# Altium PCB TDA-sma_rev2.PcbDoc
Units mm, origin at the board's own origin, x right, y up, seen from the top; angles counter-clockwise.
Board outline 14 x 38.5 mm, 4 copper layers (Top Layer, Signal Layer 1, Signal Layer 2, Bottom Layer), stack 0.651 mm thick; 4 components, 10 nets, 23 pads, 37 vias.
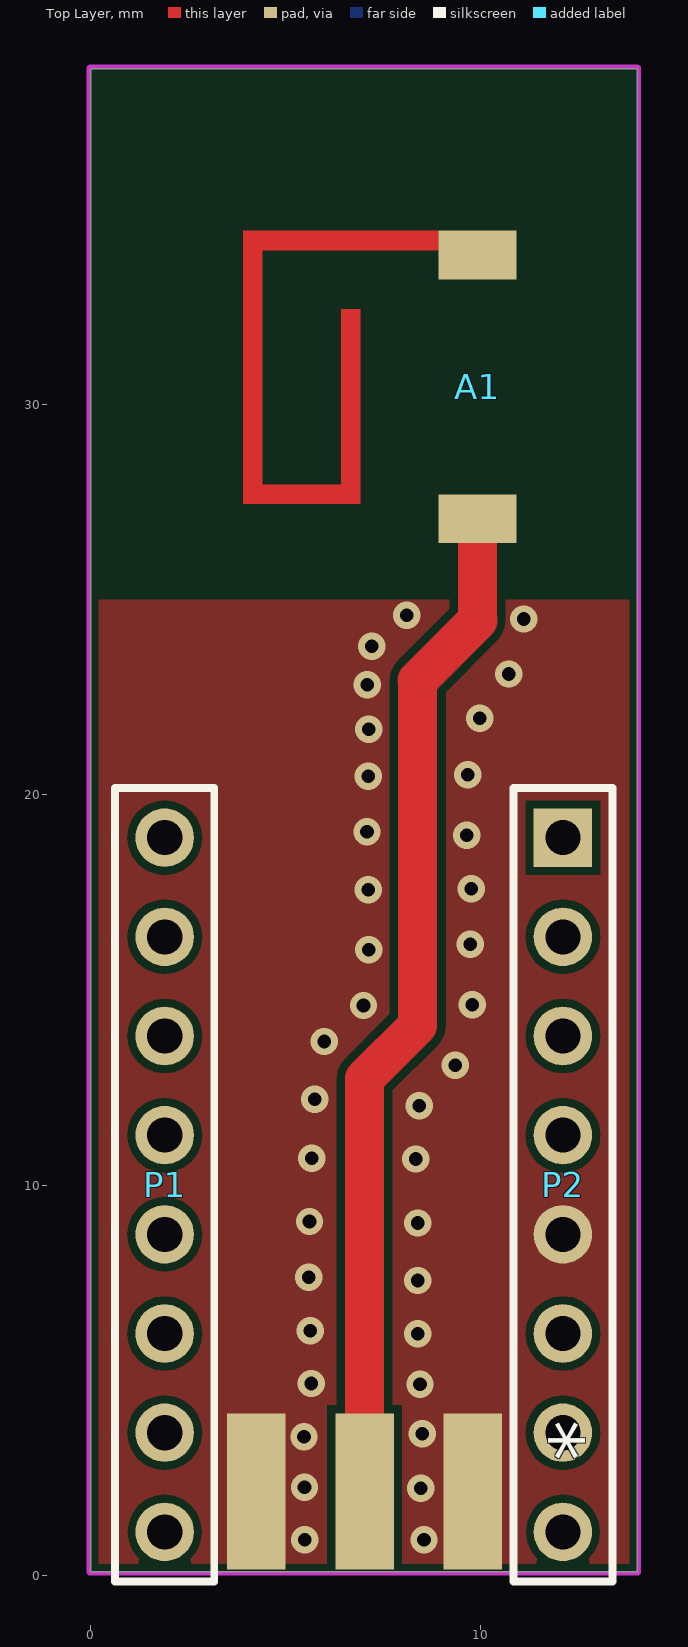
[diagram p0: Top Layer view]
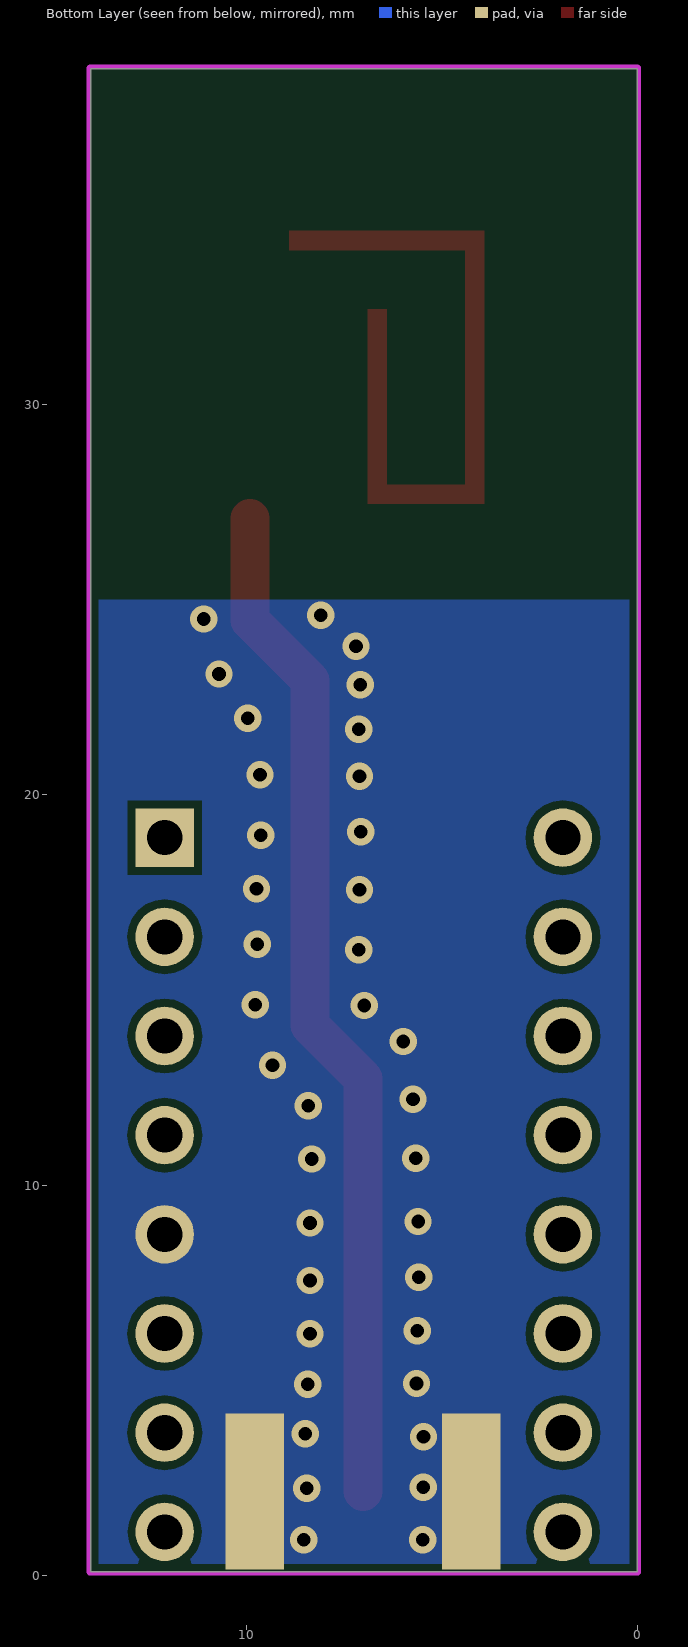
[diagram p1: Bottom Layer view, seen from below]

## Layer stack, top to bottom
Top Solder: solder mask 0.0102, Solder Resist, Dk 3.5
Top Layer: signal copper 0.0356
Dielectric1: prepreg 0.127, FR-4, Dk 4.2
Signal Layer 1: signal copper 0.036
Dielectric 3: core 0.254, FR-4, Dk 4.2
Signal Layer 2: signal copper 0.036
Dielectric 2: prepreg 0.127, FR-4, Dk 4.2
Bottom Layer: signal copper 0.0356
Bottom Solder: solder mask 0.0102, Solder Resist, Dk 3.5

## Board outline
0,0.1 14,0.1 14,38.6 0,38.6

## Design rules (kind name [scope] priority, off if disabled: settings)
Clearance Clearance_RF [InNet('RF')] p1: gap=0.22
Clearance [All] p2: gap=0.2
MinimumSolderMaskSliver [All] p1: minsoldermaskwidth=0.1
PlaneConnect [InNet('GND')] p1: planeconnectstyle=Relief reliefexpansion=0.508 reliefentries=4 reliefconductorwidth=0.254 reliefairgap=0.254
PolygonConnect PolygonConnect_1 [InComponent('X1')] p1: connectstyle=Relief reliefconductorwidth=0.254 reliefentries=4 polygonreliefangle="90 Angle" airgapwidth=0.254
PolygonConnect [All] p2: connectstyle=Direct reliefconductorwidth=0.254 reliefentries=4 polygonreliefangle="90 Angle" airgapwidth=0.254
RoutingVias [All] p1: holewidth=0.711 width=1.27 viastyle="Through Hole" minholewidth=0.3 minwidth=0.6 maxholewidth=0.711 maxwidth=1.27
SilkToSolderMaskClearance [IsPad] p1: minsilkscreentomaskgap=0 clearancetoexposedcopper=TRUE
SolderMaskExpansion [All] p1: expansion=0.07
Width Width_RF [InNet('RF')] p1: maxlimit=1.1 minlimit=0.254 preferedwidth=1
Width [All] p2: maxlimit=0.7 minlimit=0.254 preferedwidth=0.254 midlayer1_maxwidth=0.254 midlayer2_maxwidth=0.254 minimp=50.000000 maximp=50.000000 favimp=50.000000
27 further rules are at their usual default settings.

## Components (designator, comment, footprint, x,y, rotation, side; value= is the part's Value field where it differs from the comment)
* "SMA" SMA 7.02,0.15 r0 top
A1 "antenna" "Chip Antenna" 9.91,27.07 r0 top
P1 "Header 8" HDR1X8#1 1.9,18.9 r270 top
P2 "Header 8" HDR1X8#2 12.1,18.9 r270 top

## Footprints (in the part's own frame and the unit in brackets; to place one, negate y for a bottom-side part, rotate by r counter-clockwise, add the part's x,y. Pads: shape width x height; smd on the part's side, far side on the other; paste and mask are expansions set on the pad)
"Chip Antenna" [mm]
  rect 2x1.25 smd: 1(0,0) 2(0,6.75)
  Top Layer region: -3,5.375 -3.5,5.375 -3.5,0.375 -3,0.375
  Top Layer region: -3,0.875 -6,0.875 -6,0.375 -3,0.375
  Top Layer region: -5.5,7.375 -6,7.375 -6,0.375 -5.5,0.375
  Top Layer region: -1,7.375 -6,7.375 -6,6.875 -1,6.875
  body extent -1,0 1,7, height 0.8
HDR1X8#1 [mm] "Connector; Header; 8 Position"
  round 1.5 hole 0.9: 1(0,0) 2(2.54,0) 3(5.08,0) 4(7.62,0) 5(10.16,0) 6(12.7,0) 7(15.24,0) 8(17.78,0)
  silkscreen extent -1.27,-1.27 19.05,1.27
HDR1X8#2 [mm] "Connector; Header; 8 Position"
  rect 1.5x1.5 hole 0.9: 1(0,0)
  round 1.5 hole 0.9: 2(2.54,0) 3(5.08,0) 4(7.62,0) 5(10.16,0) 6(12.7,0) 7(15.24,0) 8(17.78,0)
  silkscreen extent -1.27,-1.27 19.05,1.27
SMA [mm]
  rect 1.5x4 smd: 0(-2.77,2) 0(2.77,2) 1(0,2)
  rect 1.5x4 smd far side: 0(-2.77,2) 0(2.77,2)

## Part data
P1 P2: "Header, 8-Pin"

## Via types
v1: diameter 0.7, hole 0.35, Top Layer to Bottom Layer, tented both sides, 37 vias

## Nets (pads, with @x,y where several pads share a name; then routed paths per layer and width w, separated by ;. In a path a pad name is that pad's centre, name@x,y a point inside that pad or via, vN(x,y) a via of type N, cw(c..) or ccw(c..) an arc to the next point about the centre after c; other vN are vias at no path point)
GND: *.0 P2.5
  other v1: 5.49,0.92 8.54,0.92 8.46,2.24 5.48,2.26 5.47,3.56 8.5,3.63 5.65,4.92 8.44,4.9 8.38,6.19 5.63,6.27 8.38,7.56 5.59,7.64 8.38,9.03 5.61,9.07 8.33,10.67 5.67,10.69 8.42,12.03 5.74,12.2 9.34,13.07 5.99,13.68 6.99,14.6 9.78,14.62 7.13,16.03 9.73,16.17 7.11,17.57 9.75,17.59 9.64,18.96 7.08,19.05 7.11,20.47 9.66,20.51 7.13,21.68 9.97,21.96 7.09,22.82 10.71,23.09 7.2,23.8 11.1,24.5 8.1,24.6
MISO/P0.15: P1.3
MOSI/P0.14: P1.4
P0.6: P1.8
P0.8: P1.6
P0.9: P1.5
P2.0: P1.2
PP2/P2.6: P1.1
RF: *.1 A1.1 | length 26.1
  Top Layer w1: *.1 7.02,12.73 8.38,14.09 8.38,22.93 9.91,24.46 A1.1
SCLK/P0.7: P1.7 | length 0.3
  Bottom Layer w0.254: P1.7 P1.7@2.16,3.66
pads on no net: A1.2 P2.1 P2.2 P2.3 P2.4 P2.6 P2.7 P2.8

## Polygon pours and split planes (outlines as drawn)
GND on Top Layer "Top Layer-No Net" (solid, pour order 6): 0,38.5 14,38.5 14,0 0,0
no net on Top Layer "Top Layer-No Net" (none, pour order 8): 8.734,22.576 cw(c8.38,22.93) 8.026,23.284 9.556,24.814 cw(c9.91,24.46) 10.41,24.46 cw(c9.91,24.46) 10.264,24.106
GND on Bottom Layer "Top Layer-No Net" (solid, pour order 7): 0,38.5 0,0 14,0 14,38.5

## Keep-outs
Keep-Out Layer:
  lines w0.1: -0.05,0.1 ccw(c0,0.1) 0,0.05 ; -0.05,0.1 ccw(c0,0.1) 0,0.05 ; -0.05,0.1 -0.05,38.6 ; -0.05,38.6 cw(c0,38.6) 0,38.65 ; -0.05,38.6 cw(c0,38.6) 0,38.65 ; 0,0.05 14,0.05 ; 0,38.65 14,38.65 ; 14,0.05 ccw(c14,0.1) 14.05,0.1 ; 14,0.05 ccw(c14,0.1) 14.05,0.1 ; 14,38.65 cw(c14,38.6) 14.05,38.6 ; 14,38.65 cw(c14,38.6) 14.05,38.6 ; 14.05,0.1 14.05,38.6

## Other copper
Top Layer:
  pour cut-out: 0,38.65 0,25 14,25 14,38.65
Bottom Layer:
  pour cut-out: 0,38.65 0,25 14,25 14,38.65

## Silkscreen, mask and mechanical layers (free items; w line width, h text height)
Mechanical 1:
  the board outline again, w0.01